# EAGLE board AZR3350 (EAGLE 9.2.2), part 1 of 2
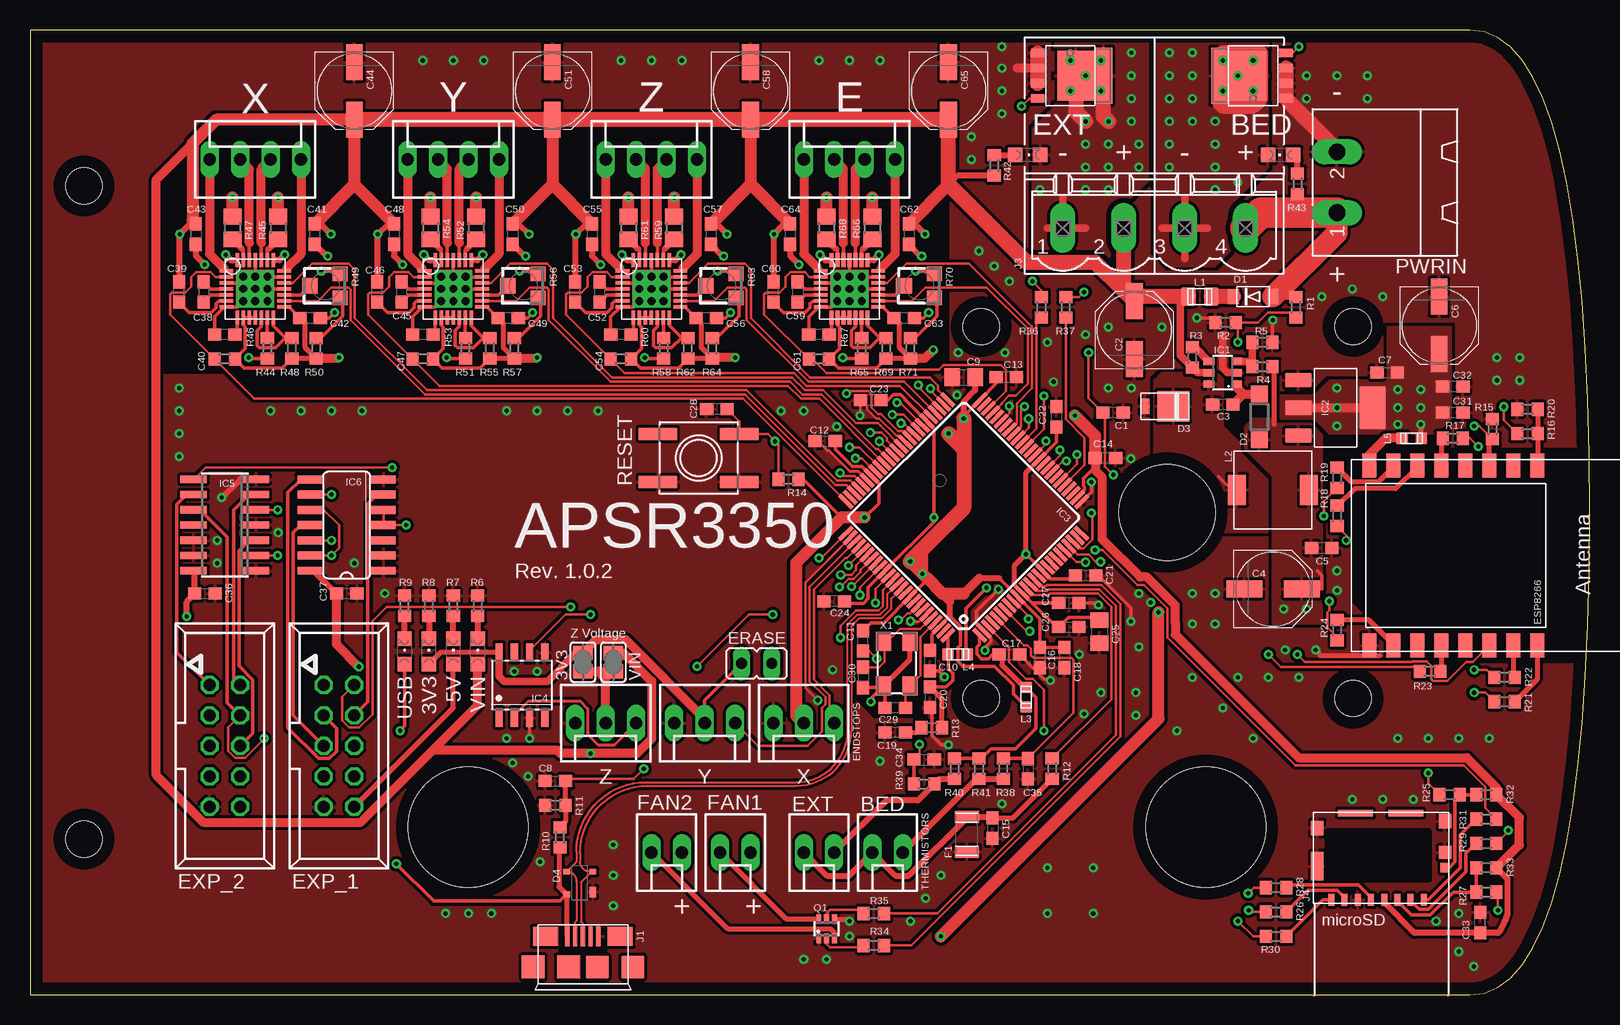
[diagram p0: board, top side]
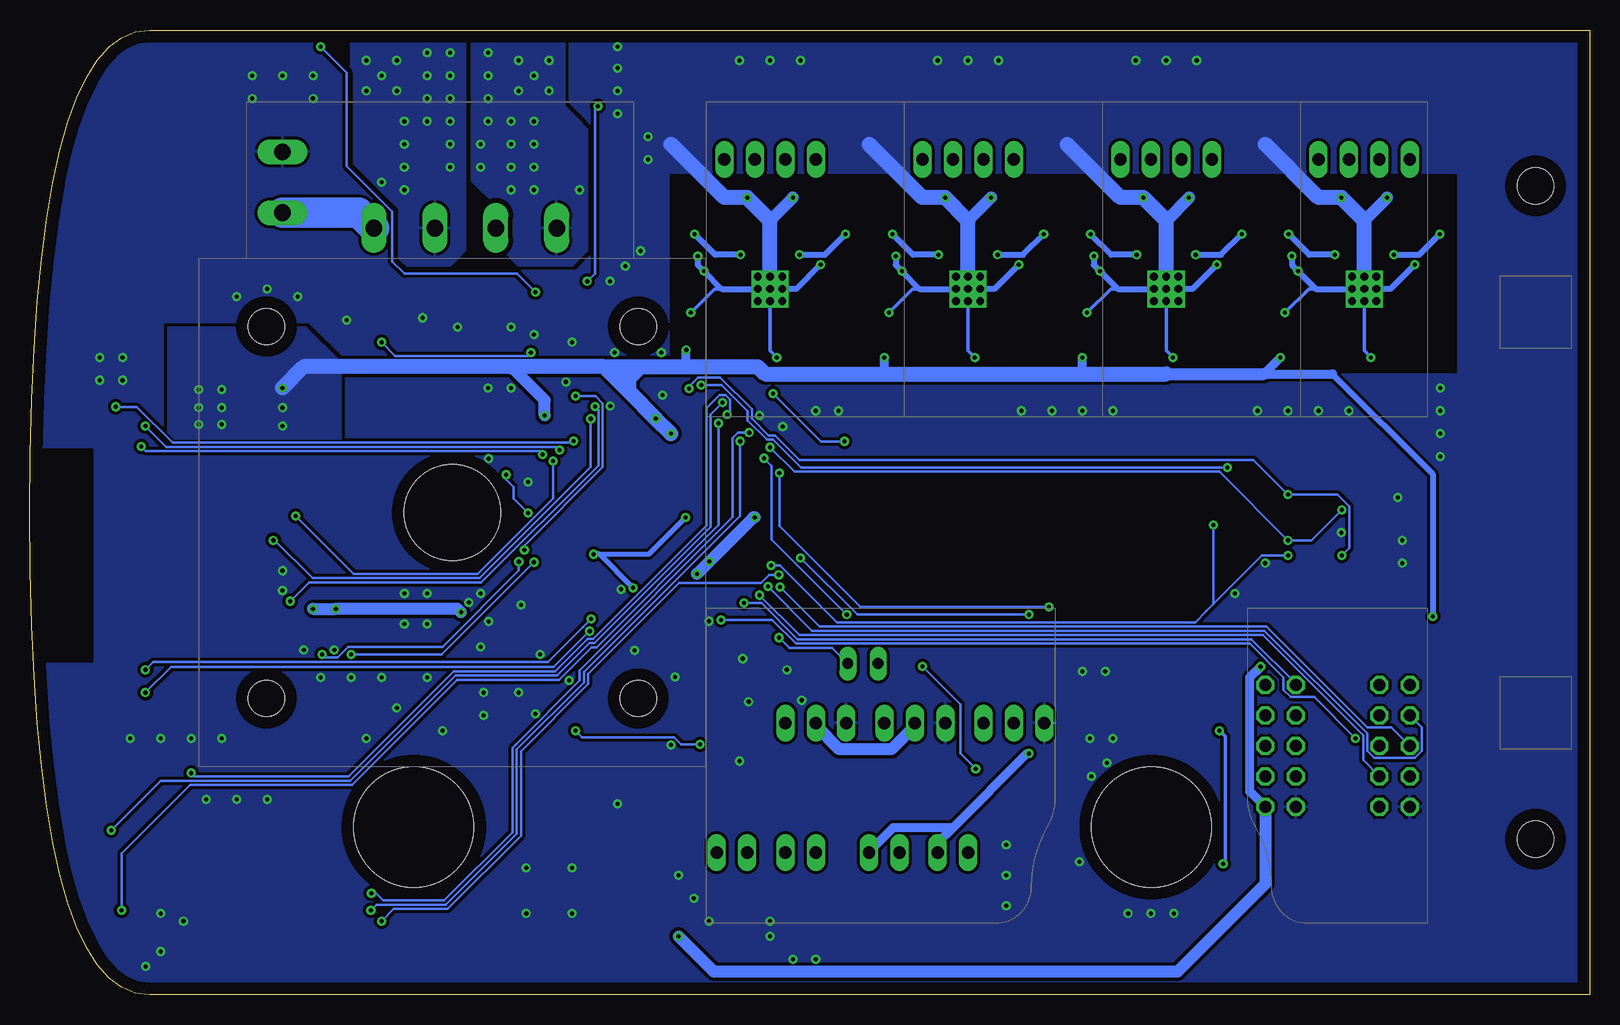
[diagram p1: board, bottom side, seen from below]

Size 130 x 80.46 mm. Coordinates in mm from the lower left corner, seen from the top.
Outline: 130,40.23 129.96,45.1 129.84,49.66 129.65,53.9 129.38,57.83 129.02,61.44 128.59,64.74 128.09,67.73 127.5,70.4 126.84,72.76 126.09,74.8 125.27,76.53 124.38,77.94 123.4,79.04 122.34,79.83 121.21,80.3 120,80.46 0,80.46 0,0 120,0 121.21,0.16 122.34,0.63 123.4,1.41 124.38,2.51 125.27,3.93 126.09,5.66 126.84,7.7 127.5,10.06 128.09,12.73 128.59,15.71 129.02,19.01 129.38,22.63 129.65,26.56 129.84,30.8 129.96,35.36 130,40.23
Copper layers (1*16): Top 0.035mm / dielectric 1.5mm / Bottom 0.035mm
Design rules "default *": minimum track width 6mil, minimum drill 0.35mm, track to track 6mil, track to pad 6mil, pad to pad 6mil, via to via 10mil, smd to smd 6mil, copper to edge 40mil, drill to drill 6mil, minimum pad ring 10mil, minimum via ring 8mil, stop-mask expansion 4mil, vias tented up to drill 0mil, thermal gap 10mil
Net classes: 1 USB: width 0.102 mm, drill 0.1 mm; 2 gnd: width 0.102 mm, drill 0.1 mm; 3 usbvcc: width 0.102 mm, drill 0.1 mm, clearance 0.15 mm; 4 diff: width 0.152 mm
Holes 3 mm at 79.29,24.73 110.29,55.73 4.5,13 4.5,67.46 79.29,55.73 110.29,24.73
Holes 8 mm at 94.79,40.23
Holes 10 mm at 98.02,14 36.52,14
tKeepout: area 76.3,21.7 to 82.3,27.7; area 76.3,52.7 to 82.3,58.7; area 1.5,64.5 to 7.5,70.5; area 1.5,10 to 7.5,16; area 107.3,21.7 to 113.3,27.7; area 107.3,52.7 to 113.3,58.7

## Footprints (pad centres in the part's own frame; a part is rotated, then mirrored left to right if it is on the bottom)
CHIPLED_0805 = smd 1.2 x 1.2: A 0,-1.05; C 0,1.05
MOLEX-KK-254-2 = drill 1.02 long: 1 -1.27,0; 2 1.27,0
C0603 = smd 1.1 x 1: 1 -0.85,0; 2 0.85,0
PANASONIC_D = smd 3 x 1.4: + 2.4,0; - -2.4,0
C0805 = smd 1.3 x 1.5: 1 -0.95,0; 2 0.95,0
SOD-123FL = smd 0.91 x 1.22: A 1.637,0; C -1.637,0
SOD123 = smd 1.4 x 1.4: A 1.9,0; C -1.9,0
DO220AAL = smd 2.667 x 2.54: P$1 -0.7,0 | smd 0.762 x 1.27: P$2 1.65,0
SOT143B = smd 0.88 x 0.55: 1 -0.75,-1.1 | smd 0.48 x 0.55: 2 0.95,-1.1; 3 0.95,1.1; 4 -0.95,1.1
MOLEX-KK-254-4 = drill 1.02 long: 1 -3.81,0; 2 -1.27,0; 3 1.27,0; 4 3.81,0
JP1 = drill 0.914 long: 1 0,-1.27; 2 0,1.27
ESP-12 = smd 2 x 1.2: 1 -7.5,4.5; 2 -7.5,2.5; 3 -7.5,0.5; 4 -7.5,-1.5; 5 -7.5,-3.5; 6 -7.5,-5.5; 7 -7.5,-7.5; 8 -7.5,-9.5; 9 7.5,-9.5; 10 7.5,-7.5; 11 7.5,-5.5; 12 7.5,-3.5; 13 7.5,-1.5; 14 7.5,0.5; 15 7.5,2.5; 16 7.5,4.5
057-010-1 = drill 1 octagon: 1 -5.08,-1.27; 2 -5.08,1.27; 3 -2.54,-1.27; 4 -2.54,1.27; 5 0,-1.27; 6 0,1.27; 7 2.54,-1.27; 8 2.54,1.27; 9 5.08,-1.27; 10 5.08,1.27
MC36207 = smd 1 x 2: 1 -1.45,0; 2 1.45,0
SOT23-6 = smd 0.6 x 0.9: 1 -0.95,-1.15; 2 0,-1.15; 3 0.95,-1.15; 4 0.95,1.15; 5 0,1.15; 6 -0.95,1.15
SOT223 = smd 2.235 x 1.219: 1 -3.099,2.311; 2 -3.099,0; 3 -3.099,-2.311 | smd 2.2 x 3.6: 4 3.099,0
LQFP100 = smd 1.5 x 0.35: 1 -7.875,6; 2 -7.875,5.5; 3 -7.875,5; 4 -7.875,4.5; 5 -7.875,4; 6 -7.875,3.5; 7 -7.875,3; 8 -7.875,2.5; 9 -7.875,2; 10 -7.875,1.5; 11 -7.875,1; 12 -7.875,0.5; 13 -7.875,0; 14 -7.875,-0.5; 15 -7.875,-1; 16 -7.875,-1.5; 17 -7.875,-2; 18 -7.875,-2.5; 19 -7.875,-3; 20 -7.875,-3.5; 21 -7.875,-4; 22 -7.875,-4.5; 23 -7.875,-5; 24 -7.875,-5.5; 25 -7.875,-6; 51 7.875,-6; 52 7.875,-5.5; 53 7.875,-5; 54 7.875,-4.5; 55 7.875,-4; 56 7.875,-3.5; 57 7.875,-3; 58 7.875,-2.5; 59 7.875,-2; 60 7.875,-1.5; 61 7.875,-1; 62 7.875,-0.5; 63 7.875,0; 64 7.875,0.5; 65 7.875,1; 66 7.875,1.5; 67 7.875,2; 68 7.875,2.5; 69 7.875,3; 70 7.875,3.5; 71 7.875,4; 72 7.875,4.5; 73 7.875,5; 74 7.875,5.5; 75 7.875,6 | smd 0.35 x 1.5: 26 -6.025,-7.875; 27 -5.525,-7.875; 28 -5.025,-7.875; 29 -4.525,-7.875; 30 -4.025,-7.875; 31 -3.525,-7.875; 32 -3.025,-7.875; 33 -2.525,-7.875; 34 -2.025,-7.875; 35 -1.525,-7.875; 36 -1.025,-7.875; 37 -0.525,-7.875; 38 -0.025,-7.875; 39 0.475,-7.875; 40 0.975,-7.875; 41 1.475,-7.875; 42 1.975,-7.875; 43 2.475,-7.875; 44 2.975,-7.875; 45 3.475,-7.875; 46 3.975,-7.875; 47 4.475,-7.875; 48 4.975,-7.875; 49 5.475,-7.875; 50 5.975,-7.875; 76 6,7.875; 77 5.5,7.875; 78 5,7.875; 79 4.5,7.875; 80 4,7.875; 81 3.5,7.875; 82 3,7.875; 83 2.5,7.875; 84 2,7.875; 85 1.5,7.875; 86 1,7.875; 87 0.5,7.875; 88 0,7.875; 89 -0.5,7.875; 90 -1,7.875; 91 -1.5,7.875; 92 -2,7.875; 93 -2.5,7.875; 94 -3,7.875; 95 -3.5,7.875; 96 -4,7.875; 97 -4.5,7.875; 98 -5,7.875; 99 -5.5,7.875; 100 -6,7.875
SOIC08-FAIRCHILD = smd 0.61 x 1.52: 1 -1.905,-2.723; 2 -0.635,-2.723; 3 0.635,-2.723; 4 1.905,-2.723; 5 1.905,2.723; 6 0.635,2.723; 7 -0.635,2.723; 8 -1.905,2.723
SO14 = smd 0.6 x 2.2: 1 -3.81,-2.6; 2 -2.54,-2.6; 3 -1.27,-2.6; 4 0,-2.6; 5 1.27,-2.6; 6 2.54,-2.6; 7 3.81,-2.6; 8 3.81,2.6; 9 2.54,2.6; 10 1.27,2.6; 11 0,2.6; 12 -1.27,2.6; 13 -2.54,2.6; 14 -3.81,2.6
SO14' = smd 0.66 x 2.032: 1 -3.81,-3.073; 2 -2.54,-3.073; 3 -1.27,-3.073; 4 0,-3.073; 5 1.27,-3.073; 6 2.54,-3.073; 7 3.81,-3.073; 8 3.81,3.073; 9 2.54,3.073; 10 1.27,3.073; 11 0,3.073; 12 -1.27,3.073; 13 -2.54,3.073; 14 -3.81,3.073
QFN28-TP = smd 1.15 x 0.3: 1 -2.4,1.5; 2 -2.4,1; 3 -2.4,0.5; 4 -2.4,0; 5 -2.4,-0.5; 6 -2.4,-1; 7 -2.4,-1.5; 15 2.4,-1.5; 16 2.4,-1; 17 2.4,-0.5; 18 2.4,0; 19 2.4,0.5; 20 2.4,1; 21 2.4,1.5 | smd 0.3 x 1.15: 8 -1.5,-2.4; 9 -1,-2.4; 10 -0.5,-2.4; 11 0,-2.4; 12 0.5,-2.4; 13 1,-2.4; 14 1.5,-2.4; 22 1.5,2.4; 23 1,2.4; 24 0.5,2.4; 25 0,2.4; 26 -0.5,2.4; 27 -1,2.4; 28 -1.5,2.4 | smd 3.15 x 3.15: PAD 0,0
USB-MICRO-10103594 = smd 0.4 x 1.6: D+ 0,0; D- -0.65,0; GND 1.3,0; ID 0.65,0; VBUS -1.3,0 | smd 1.9 x 1.9: SHLD1 -1.2,-2.55; SHLD2 1.2,-2.55; SHLD3 -4.15,-2.55; SHLD4 4.15,-2.55 | smd 2.1 x 1.6: SHLD5 3.1,0; SHLD6 -3.1,0
MSTBV4 = drill 1.397 long: 1 -7.62,0; 2 -2.54,0; 3 2.54,0; 4 7.62,0
MOLEX-105162 = smd 1.05 x 1.08: G1 5.325,4.45 | smd 1.05 x 1.2: G2 5.325,7.06; G3 -5.325,6.49 | smd 1.05 x 2.39: G4 -5.325,3.305 | smd 0.5 x 1: P1 3.55,0.5; P2 2.45,0.5; P3 1.35,0.5; P4 0.25,0.5; P5 -0.85,0.5; P6 -1.95,0.5; P7 -3.05,0.5; P8 -4.15,0.5 | smd 0.72 x 0.78: P9 5.31,3.18 | smd 2.91 x 0.55: X1 -2.145,7.735; X2 2.045,7.735
C0805' = smd 1.5 x 1.25: 1 0,0.95; 2 0,-0.95
SRR0604 = smd 1.5 x 2.5: P$1 3,0; P$2 -3,0
C0603' = smd 1 x 0.95: 1 0,0.8; 2 0,-0.8
MSTBA2 = drill 1.397 long: 1 -2.54,5.08; 2 2.54,5.08
SOT363_PHILIPS = smd 0.4 x 0.8: 1 -0.65,-0.8; 2 0,-0.8; 3 0.65,-0.8; 4 0.65,0.8; 5 0,0.8; 6 -0.65,0.8
SOT-669 = smd 0.7 x 1.15: 1 -1.905,-2.725; 2 -0.635,-2.725; 3 0.635,-2.725; 4 1.905,-2.725 | smd 4.2 x 3.1: EXP 0,0.45 | smd 4.7 x 1.5: MB 0,2.75
R0603 = smd 1 x 1.1: 1 -0.85,0; 2 0.85,0
R0805 = smd 1.3 x 1.5: 1 -0.95,0; 2 0.95,0
RTRIM3103 = smd 1.2 x 1.25: 1 -1,-1.225; 3 1,-1.225 | smd 1.3 x 1.3: 2 0,1.3
EVQQ2 = smd 3.2 x 1: A -3.4,2; A' 3.4,2; B -3.4,-2; B' 3.4,-2
SJ = smd 1.168 x 1.6: 1 -0.762,0; 2 0.762,0
5.0X3.2_KX-9A = smd 1.6 x 1.25: 1 -1.85,-1.1; 2 1.85,-1.1; 3 1.85,1.1; 4 -1.85,1.1
MOLEX-KK-254-3 = drill 1.02 long: 1 -2.54,0; 2 0,0; 3 2.54,0

## Placement (x,y rotation side)
3V3  [CHIPLED_0805]  33.26,28.64 0 top
5V  [CHIPLED_0805]  35.29,28.64 0 top
BED  KK-254-2  [MOLEX-KK-254-2]  71.48,11.88 180 top
BED_L  [CHIPLED_0805]  104.25,70.04 90 top
C1  10n  [C0603]  90.28,48.58 0 top
C2  10uF  [PANASONIC_D]  92.06,55.44 90 top
C3  100n  [C0603]  99.42,49.21 180 top
C4  47u  [PANASONIC_D]  103.62,33.85 0 top
C5  4.7uF  [C0603]  107.68,37.28 0 top
C6  10uF  [PANASONIC_D]  117.46,55.82 270 top
C7  4.7uF  [C0603]  113.14,51.88 0 top
C8  100n  [C0603]  43.8,17.84 0 top
C9  10u  [C0805]  77.84,51.5 0 top
C10  100n  [C0603]  75.04,27.88 90 top
C11  100n  [C0603]  69.45,29.53 90 top
C12  100n  [C0603]  66.28,46.17 0 top
C13  100n  [C0603]  81.39,51.5 180 top
C14  100n  [C0603]  89.65,44.77 180 top
C15  2.2u  [C0603]  80.25,13.91 270 top
C16  100n  [C0603]  84.19,28.13 270 top
C17  100n  [C0603]  81.65,28.39 0 top
C18  10u  [C0603]  86.22,28.13 270 top
C19  4u7  [C0603]  72.12,21.91 180 top
C20  100n  [C0603]  75.04,24.83 270 top
C21  100n  [C0603]  88,34.99 0 top
C22  100n  [C0603]  85.58,48.2 90 top
C23  100n  [C0603]  70.09,49.59 180 top
C24  100n  [C0603]  67.04,32.83 180 top
C25  10u  [C0805]  89.14,30.29 270 top
C26  100n  [C0603]  86.6,30.67 0 top
C27  2.2u 0.1-10ohm ESR  [C0603]  86.6,32.7 0 top
C28  10n  [C0603]  57.26,48.83 180 top
C29  10p  [C0603]  72.12,23.94 180 top
C30  10p  [C0603]  69.45,26.48 270 top
C31  10u  [C0603]  118.6,48.58 0 top
C32  10u  [C0603]  118.6,50.74 0 top
C33  2K2  [C0603]  120.89,6.03 90 top
C34  2.2u  [C0603]  74.53,19.62 0 top
C35  2.2u  [C0603]  83.17,18.86 270 top
C36  2.2u  [C0603]  14.59,33.47 0 top
C37  100n  [C0603]  26.4,33.47 0 top
C38  100n  [C0603]  14.46,58.61 270 top
C39  100n  [C0603]  12.43,58.61 90 top
C40  220n  [C0603]  16.24,55.06 180 top
C41  100n  [C0603]  23.73,63.44 270 top
C42  220n  [C0603]  23.35,56.45 0 top
C43  100n  [C0603]  13.83,63.44 270 top
C44  100u  [PANASONIC_D]  27.03,75.38 270 top
C45  100n  [C0603]  30.97,58.61 270 top
C46  100n  [C0603]  28.94,58.61 90 top
C47  220n  [C0603]  32.75,55.06 180 top
C48  100n  [C0603]  30.34,63.44 270 top
C49  220n  [C0603]  39.86,56.45 0 top
C50  100n  [C0603]  40.24,63.44 270 top
C51  100u  [PANASONIC_D]  43.55,75.38 270 top
C52  100n  [C0603]  47.48,58.61 270 top
C53  100n  [C0603]  45.45,58.61 90 top
C54  220n  [C0603]  49.26,55.06 180 top
C55  100n  [C0603]  46.85,63.44 270 top
C56  220n  [C0603]  56.37,56.45 0 top
C57  100n  [C0603]  56.75,63.44 270 top
C58  100u  [PANASONIC_D]  60.05,75.38 270 top
C59  100n  [C0603]  63.99,58.61 270 top
C60  100n  [C0603]  61.96,58.61 90 top
C61  220n  [C0603]  65.77,55.06 180 top
C62  100n  [C0603]  73.26,63.44 270 top
C63  220n  [C0603]  72.88,56.45 0 top
C64  100n  [C0603]  63.36,63.44 270 top
C65  100u  [PANASONIC_D]  76.56,75.38 270 top
D1  BYS10-45-E3  [SOD-123FL]  101.97,58.23 0 top
D2  CD1206-S01575  [SOD123]  102.47,48.2 270 top
D3  SS1P3L  [DO220AAL]  94.6,49.09 180 top
D4  PRTR5V0U2XB  [SOT143B]  45.83,9.34 90 top
E  KK-254-4  [MOLEX-KK-254-4]  68.31,69.66 0 top
ERASE  [JP1]  60.56,27.62 270 top
ESP8266  [ESP-12]  121.14,36.64 270 top
EXP_1  057-010-1  [057-010-1]  25.77,20.77 270 top
EXP_2  057-010-1  [057-010-1]  16.24,20.77 270 top
EXT  KK-254-2  [MOLEX-KK-254-2]  65.77,11.88 180 top
EXT_L  [CHIPLED_0805]  83.17,70.04 270 top
F1  MC36207  [MC36207]  78.09,13.4 270 top
FAN1  KK-254-2  [MOLEX-KK-254-2]  58.79,11.88 180 top
FAN2  KK-254-2  [MOLEX-KK-254-2]  53.07,11.88 180 top
IC1  LM2734Y  [SOT23-6]  99.42,51.88 90 top
IC2  LDO-TS1117CW-3V3  [SOT223]  108.82,48.96 0 top
IC3  ATSAM4S8C  [LQFP100]  77.84,39.82 135 top
IC4  SI87XXIS  [SOIC08-FAIRCHILD]  41.01,25.85 0 top
IC5  74HC125  [SO14]  16.24,39.18 90 top
IC6  74S08D  [SO14']  26.4,39.18 90 top
IC7  A4988  [QFN28-TP]  18.78,58.87 0 top
IC8  A4988  [QFN28-TP]  35.29,58.87 0 top
IC9  A4988  [QFN28-TP]  51.8,58.87 0 top
IC10  A4988  [QFN28-TP]  68.31,58.87 0 top
J1  ZX62-AB-5PA  [USB-MICRO-10103594]  46.09,4.89 0 top
J3  MSTBV4  [MSTBV4]  93.71,63.95 0 top
J4  MOLEX-105162-001  [MOLEX-105162]  112.63,7.43 0 top
L1  MH2029-300Y  [C0805']  97.52,58.23 270 top
L2  10uH-SRR0604-100ML  [SRR0604]  103.62,42.1 180 top
L3  10uH 100MHz  [C0603']  83.04,24.83 0 top
L4  10uH 100MHz  [C0603']  77.33,28.39 90 top
L5  4n7H  [C0603']  115.17,46.42 270 top
PWRIN  MSTBA2  [MSTBA2]  114.03,67.76 90 top
Q1  NX138BKS  [SOT363_PHILIPS]  66.41,5.53 0 top
Q2  BUK9Y53-100B  [SOT-669]  86.72,76.65 270 top
Q3  BUK9Y53-100B  [SOT-669]  101.97,76.65 90 top
R1  47K  [R0603]  105.52,57.34 90 top
R2  4K7  [R0603]  99.68,56.07 0 top
R3  100k  [R0603]  96.89,53.15 90 top
R4  5.53k  [R0603]  102.73,52.39 180 top
R5  10k  [R0603]  102.73,54.42 0 top
R6  4K7  [R0603]  37.32,32.45 90 top
R7  2K2  [R0603]  35.29,32.45 90 top
R8  180R  [R0603]  33.26,32.45 90 top
R9  2K2  [R0603]  31.23,32.45 90 top
R10  27K  [R0603]  44.18,13.15 90 top
R11  47K  [R0603]  43.8,15.81 180 top
R12  10K  [R0603]  85.2,18.86 270 top
R13  1R  [R0603]  75.17,22.29 0 top
R14  10K  [R0603]  63.23,42.99 0 top
R15  4K7  [R0603]  121.9,47.18 90 top
R16  470R  [R0603]  124.83,46.8 0 top
R17  47R  [R0603]  118.6,46.42 0 top
R18  47R  [R0603]  108.95,39.94 270 top
R19  47R  [R0603]  108.95,43.12 270 top
R20  2K2  [R0603]  124.83,48.83 0 top
R21  2K2  [R0603]  122.92,24.45 0 top
R22  470R  [R0603]  122.92,26.48 0 top
R23  2K2  [R0603]  116.7,26.99 0 top
R24  2K2  [R0603]  108.95,30.42 90 top
R25  220R  [R0603]  118.35,16.7 0 top
R26  220R  [R0603]  103.87,6.92 0 top
R27  220R  [R0603]  121.4,8.57 180 top
R28  100R  [R0603]  103.87,8.95 0 top
R29  220R  [R0603]  121.4,12.64 180 top
R30  220R  [R0603]  103.87,4.89 0 top
R31  220R  [R0603]  121.4,14.67 180 top
R32  10K  [R0603]  121.4,16.7 0 top
R33  10K  [R0603]  121.4,10.61 0 top
R34  1K  [R0603]  70.34,4.13 180 top
R35  1K  [R0603]  70.34,6.8 180 top
R36  180R  [R0603]  84.31,57.34 90 top
R37  180R  [R0603]  86.34,57.34 90 top
R38  10K  [R0603]  81.14,18.86 270 top
R39  10K  [R0603]  74.53,17.59 0 top
R40  4K7 0.1%  [R0603]  77.07,18.86 90 top
R41  4K7 0.1%  [R0603]  79.11,18.86 90 top
R42  4K7  [R0603]  80.38,69.15 270 top
R43  4K7  [R0603]  105.65,67.63 270 top
R44  10K  [R0603]  19.8,53.91 270 top
R45  0R2  [R0805]  20.69,63.95 270 top
R46  10K  [R0603]  16.24,53.02 0 top
R47  0R2  [R0805]  16.88,63.95 270 top
R48  100K  [R0603]  21.83,53.91 270 top
R49  10K  [RTRIM3103]  24.62,59.12 90 top
R50  20K  [R0603]  23.86,53.91 270 top
R51  10K  [R0603]  36.31,53.91 270 top
R52  0R2  [R0805]  37.2,63.95 270 top
R53  10K  [R0603]  32.75,53.02 0 top
R54  0R2  [R0805]  33.39,63.95 270 top
R55  100K  [R0603]  38.34,53.91 270 top
R56  10K  [RTRIM3103]  41.13,59.12 90 top
R57  20K  [R0603]  40.37,53.91 270 top
R58  10K  [R0603]  52.82,53.91 270 top
R59  0R2  [R0805]  53.71,63.95 270 top
R60  10K  [R0603]  49.26,53.02 0 top
R61  0R2  [R0805]  49.9,63.95 270 top
R62  100K  [R0603]  54.85,53.91 270 top
R63  10K  [RTRIM3103]  57.64,59.12 90 top
R64  20K  [R0603]  56.88,53.91 270 top
R65  10K  [R0603]  69.33,53.91 270 top
R66  0R2  [R0805]  70.22,63.95 270 top
R67  10K  [R0603]  65.77,53.02 0 top
R68  0R2  [R0805]  66.41,63.95 270 top
R69  100K  [R0603]  71.36,53.91 270 top
R70  10K  [RTRIM3103]  74.15,59.12 90 top
R71  20K  [R0603]  73.39,53.91 270 top
RESET  [EVQQ2]  55.74,44.77 0 top
SJ1  [SJ]  46.09,27.75 270 top
SJ2  [SJ]  48.62,27.75 270 top
USB  [CHIPLED_0805]  31.23,28.64 0 top
VIN  [CHIPLED_0805]  37.32,28.64 0 top
X  KK-254-4  [MOLEX-KK-254-4]  18.78,69.66 0 top
X1  12MHz  [5.0X3.2_KX-9A]  72.25,27.62 270 top
X_STOP  KK-254-3  [MOLEX-KK-254-3]  64.5,22.67 180 top
Y  KK-254-4  [MOLEX-KK-254-4]  35.29,69.66 0 top
Y_STOP  KK-254-3  [MOLEX-KK-254-3]  56.25,22.67 180 top
Z  KK-254-4  [MOLEX-KK-254-4]  51.8,69.66 0 top
Z_STOP  KK-254-3  [MOLEX-KK-254-3]  47.99,22.67 180 top

## Library data of the parts
3V3 5V BED_L EXT_L USB VIN = led
BED E EXT FAN1 FAN2 X X_STOP Y Y_STOP Z Z_STOP = con-other
C1-C65 R1-R71 = resistor
D1 ESP8266 = adafruit
D2 = diode
D3 = Diodi; CASE: SMP; MONTHLY_USAGE: _____; PART_NUMBER: SS1P3L-M3/84A; PRICE: _____; SUPPLIER: _____; TYPE: Diodi
D4 J1 L1 = Arduino
ERASE SJ1 SJ2 = jumper
EXP_1 EXP_2 = con-panduit; OC_FARNELL: unknown; OC_NEWARK: unknown
F1 IC3-IC5 J4 Q1-Q3 RESET X1 = misc
IC1 = Circuito Integrato; CASE: SOT23-5; MONTHLY_USAGE: _____; PART_NUMBER: LM2734YMK; PRICE: _____; SUPPLIER: _____; TYPE: Circuito_Integrato
IC2 = we-power
IC6 = 74xx-us
IC7-IC10 = RepRapjr
J3 = con-phoenix-508; MPN: MSTBV 2,5/4-GF-5.08; OC_FARNELL: 1792794; OC_NEWARK: 69R9847
L2 = Induttanze; CASE: SMD_6,5x6,5; MONTHLY_USAGE: _____; PART_NUMBER: SRR0604-100ML; PRICE: _____; SUPPLIER: _____; TYPE: Induttanze
L3-L5 = Zero_V1.0
PWRIN = con-phoenix-508; MF: FARNELL; MPN: 1757242; OC_FARNELL: 3705171; OC_NEWARK: 71C4161

## Nets
3V3_LED: 3V3.C R8.1
5V_LED: 5V.C R7.1
24V_LED: R6.1 VIN.C
+3V3: 3V3.A C6.+ C7.2 C9.2 C10.2 C11.2 C12.2 C13.2 C14.2 C16.1 C18.1 C31.1 C32.1 C33.1 C36.1 C42.1 C49.1 C56.1 C63.1 ERASE.1 IC2.2 IC2.4 IC3.10 IC3.27 IC3.50 IC3.69 IC3.91 IC3.98 IC4.8 IC5.14 IC7.9 IC7.10 IC7.11 IC7.15 IC8.9 IC8.10 IC8.11 IC8.15 IC9.9 IC9.10 IC9.11 IC9.15 IC10.9 IC10.10 IC10.11 IC10.15 J4.P4 L3.2 L5.1 R14.2 R32.2 R33.2 R46.2 R48.2 R50.2 R53.2 R55.2 R57.2 R60.2 R62.2 R64.2 R67.2 R69.2 R71.2 SJ1.1 X_STOP.2 Y_STOP.2
+5V [usbvcc]: 5V.A C4.+ C5.1 C37.1 D2.A EXP_1.10 IC2.3 IC6.14 L2.P$2 R4.1
+24V: C2.+ C39.2 C41.1 C43.1 C44.+ C46.2 C48.1 C50.1 C51.+ C53.2 C55.1 C57.1 C58.+ C60.2 C62.1 C64.1 C65.+ FAN1.1 FAN2.1 IC1.5 IC7.22 IC7.28 IC8.22 IC8.28 IC9.22 IC9.28 IC10.22 IC10.28 J3.2 L1.2 R3.1 R42.2 SJ2.1 VIN.A
ADVREF: C17.1 IC3.1 L3.1 R40.2 R41.2
BED: IC3.30 R37.1
BED_D: BED_L.C J3.3 Q3.EXP Q3.MB
BED_G: Q3.4 R37.2
BED_L: BED_L.A R43.1
BEEPER: EXP_1.1 IC3.86
BOOST: C3.1 D2.C IC1.1
BTN_EN1: EXP_2.5 IC3.82
BTN_EN2: EXP_2.3 IC3.83
BTN_ENC: EXP_1.2 IC3.71
CLK: J4.P5 R28.2
CMD: J4.P3 R27.2 R33.1
CP1E: C59.1 IC10.4
CP1X: C38.1 IC7.4
CP1Y: C45.1 IC8.4
CP1Z: C52.1 IC9.4
CP2E: C59.2 IC10.5
CP2X: C38.2 IC7.5
CP2Y: C45.2 IC8.5
CP2Z: C52.2 IC9.5
DAT0: J4.P7 R26.2
DAT1: J4.P8 R30.2
DAT2: J4.P1 R31.2
DAT3: J4.P2 R29.2
DET: J4.P9 R25.2 R32.1
E_DIR: IC3.43 IC10.19
E_EN: IC3.48 IC10.2 R67.1
E_STEP: IC3.47 IC10.16
EDR_CONN: ESP8266.12 R23.2
EMOT1A: E.3 IC10.24
EMOT1B: E.4 IC10.21
EMOT2A: E.2 IC10.26
EMOT2B: E.1 IC10.1
ERASE: ERASE.2 IC3.87
ESP_CS: ESP8266.10 R24.2
ESP_DATA_RDY: IC3.21 R23.1
ESP_EN: ESP8266.3 IC3.34 R15.1
ESP_MISO: ESP8266.6 R18.1
ESP_MOSI: ESP8266.7 R19.1
ESP_RESET: ESP8266.1 R16.2 R20.2
ESP_RST: IC3.37 R16.1
ESP_SPCK: ESP8266.5 R17.1
ESP_URDX: ESP8266.16 R21.2
ESP_UTDX: ESP8266.15 R22.2
ESP_VIN: ESP8266.8 L5.2
EXT_D: EXT_L.C J3.1 Q2.EXP Q2.MB
EXT_G: Q2.4 R36.2
EXT_L: EXT_L.A R42.1
FAN1: IC3.14 R34.1
FAN1_D: FAN1.2 Q1.6
FAN1_G: Q1.2 R34.2
FAN2: IC3.13 R35.1
FAN2_D: FAN2.2 Q1.3
FAN2_G: Q1.5 R35.2
FB: IC1.3 R4.2 R5.1
GND: C1.2 C2.- C4.- C5.2 C6.- C7.1 C8.1 C9.1 C10.1 C11.1 C12.1 C13.1 C14.1 C15.2 C16.2 C17.2 C18.2 C19.2 C20.2 C21.2 C22.2 C23.2 C24.2 C25.2 C26.2 C27.2 C28.2 C29.2 C30.2 C31.2 C32.2 C33.2 C34.2 C35.2 C36.2 C37.2 C40.2 C41.2 C42.2 C43.2 C44.- C47.2 C48.2 C49.2 C50.2 C51.- C54.2 C55.2 C56.2 C57.2 C58.- C61.2 C62.2 C63.2 C64.2 C65.- D3.P$2 D4.1 ESP8266.9 EXP_1.9 EXP_2.9 F1.2 IC1.2 IC2.1 IC3.2 IC3.26 IC3.45 IC3.61 IC3.70 IC3.77 IC3.95 IC4.3 IC4.5 IC5.1 IC5.4 IC5.7 IC5.12 IC5.13 IC6.1 IC6.2 IC6.7 IC7.3 IC7.7 IC7.18 IC7.20 IC7.25 IC7.PAD IC8.3 IC8.7 IC8.18 IC8.20 IC8.25 IC8.PAD IC9.3 IC9.7 IC9.18 IC9.20 IC9.25 IC9.PAD IC10.3 IC10.7 IC10.18 IC10.20 IC10.25 IC10.PAD J1.GND J4.G1 J4.G2 J4.G3 J4.G4 J4.P6 PWRIN.2 Q1.1 Q1.4 Q2.1 Q2.2 Q2.3 Q3.1 Q3.2 Q3.3 R2.1 R5.2 R6.2 R7.2 R8.2 R9.2 R11.2 R15.2 R20.1 R44.2 R45.1 R47.1 R49.3 R51.2 R52.1 R54.1 R56.3 R58.2 R59.1 R61.1 R63.3 R65.2 R66.1 R68.1 R70.3 RESET.B RESET.B' X1.2 X1.4 X_STOP.3 Y_STOP.3 Z_STOP.3
HOTEND: IC3.40 R36.1
LCD_CS: IC3.80 IC6.4 IC6.5 IC6.10 IC6.13
LCD_CS_BUF: EXP_1.4 IC6.6
LCD_MISO: IC3.53 IC5.8
LCD_MISO_BUF: EXP_2.1 IC5.9
LCD_MOSI: IC3.52 IC5.2 IC6.9
LCD_MOSI_BUF: EXP_1.3 IC6.8
LCD_RST: EXP_2.8 IC3.84
LCD_SCK: IC3.67 IC5.5 IC6.12
LCD_SCK_BUF: EXP_1.5 IC6.11
LCD_SD_CS: EXP_2.4 IC3.93 IC5.10
MCCDA: IC3.59 R27.1
MCCK: IC3.63 R28.1
MCDA0: IC3.64 R26.1
MCDA1: IC3.81 R30.1
MCDA2: IC3.39 R31.1
MCDA3: IC3.57 R29.1
MISO: IC3.41 R18.2
MOSI: IC3.33 R19.2
N$1: C19.1 R13.1
NPCS0: IC3.42 R24.1
PWR_FAIL_DET: C1.1 IC3.23 R1.1 R2.2
REFE: IC10.17 R70.2
REFE-IN: R70.1 R71.1
REFX: IC7.17 R49.2
REFX-IN: R49.1 R50.1
REFY: IC8.17 R56.2
REFY-IN: R56.1 R57.1
REFZ: IC9.17 R63.2
REFZ-IN: R63.1 R64.1
RESET: C28.1 IC3.60 R14.1 RESET.A'
ROSCE: IC10.13 R65.1
ROSCX: IC7.13 R44.1
ROSCY: IC8.13 R51.1
ROSCZ: IC9.13 R58.1
RSTE: IC10.12 IC10.14 R69.1
RSTX: IC7.12 IC7.14 R48.1
RSTY: IC8.12 IC8.14 R55.1
RSTZ: IC9.12 IC9.14 R62.1
SAM_TFR_RDY: ESP8266.14 IC3.22
SD_CD: IC3.58 R25.1
SD_MOSI_BUF: EXP_2.6 IC5.3
SD_SCK_BUF: EXP_2.2 IC5.6
SHDN: IC1.4 R3.2
SNS1E: IC10.23 R66.2
SNS1X: IC7.23 R45.2
SNS1Y: IC8.23 R52.2
SNS1Z: IC9.23 R59.2
SNS2E: IC10.27 R68.2
SNS2X: IC7.27 R47.2
SNS2Y: IC8.27 R54.2
SNS2Z: IC9.27 R61.2
SPCK: IC3.31 R17.2
SW [USB]: C3.2 D3.P$1 IC1.6 L2.P$1
T_BED: C35.1 IC3.5 R38.1
T_BED_IN: BED.1 R38.2 R41.1
T_EXT: C34.1 IC3.3 R39.1
T_EXT_IN: EXT.1 R39.2 R40.1
URXD1: IC3.7 R21.1
USB_LED: R9.1 USB.C
USB_N [diff]: D4.3 IC3.88 J1.D-
USB_P [diff]: D4.2 IC3.89 J1.D+
USB_PWR_MON: C8.2 IC3.68 R10.2 R11.1
UTXD1: IC3.9 R22.1
VBUS: D4.4 J1.VBUS R10.1 USB.A
VCPE: C60.1 IC10.6
VCPX: C39.1 IC7.6
VCPY: C46.1 IC8.6
VCPZ: C53.1 IC9.6
VDDOUT: C21.1 C22.1 C23.1 C24.1 C25.1 C26.1 C27.1 IC3.11 IC3.16 IC3.36 IC3.56 IC3.85 L4.2
VDDPLL: C20.1 IC3.100 L4.1 R13.2
VIN: D1.A J3.4 PWRIN.1 R1.2 R43.2
VIN_F: D1.C L1.1
VREGE: C61.1 IC10.8
VREGX: C40.1 IC7.8
VREGY: C47.1 IC8.8
VREGZ: C54.1 IC9.8
VSSA: BED.2 C15.1 EXT.2 F1.1 R12.2
VSSA_MON: IC3.12 R12.1
X_DIR: IC3.72 IC7.19
X_EN: IC3.75 IC7.2 R46.1
X_STEP: IC3.73 IC7.16
X_STOP: IC3.79 X_STOP.1
XIN: C29.1 IC3.97 X1.3
XMOT1A: IC7.24 X.3
XMOT1B: IC7.21 X.4
XMOT2A: IC7.26 X.2
XMOT2B: IC7.1 X.1
XOUT: C30.1 IC3.96 X1.1
Y_DIR: IC3.62 IC8.19
Y_EN: IC3.66 IC8.2 R53.1
Y_STEP: IC3.65 IC8.16
Y_STOP: IC3.78 Y_STOP.1
YMOT1A: IC8.24 Y.3
YMOT1B: IC8.21 Y.4
YMOT2A: IC8.26 Y.2
YMOT2B: IC8.1 Y.1
Z_DIR: IC3.51 IC9.19
Z_EN: IC3.55 IC9.2 R60.1
Z_STEP: IC3.54 IC9.16
Z_STOP: IC3.76 IC4.6
Z_STOP_IN: IC4.2 Z_STOP.1
ZMOT1A: IC9.24 Z.3
ZMOT1B: IC9.21 Z.4
ZMOT2A: IC9.26 Z.2
ZMOT2B: IC9.1 Z.1
ZVSEL: SJ1.2 SJ2.2 Z_STOP.2